# Altium PCB CAN_TO_USART_V2.2.PcbDoc (part 1 of 2)
Units mil, origin at the board's own origin, x right, y up, seen from the top; angles counter-clockwise.
Board outline 2554.34 x 2204.34 mil, 2 copper layers (Top Layer, Bottom Layer); 154 components, 100 nets, 467 pads, 218 vias.
Unrouted connection lines stored in the file: 118.
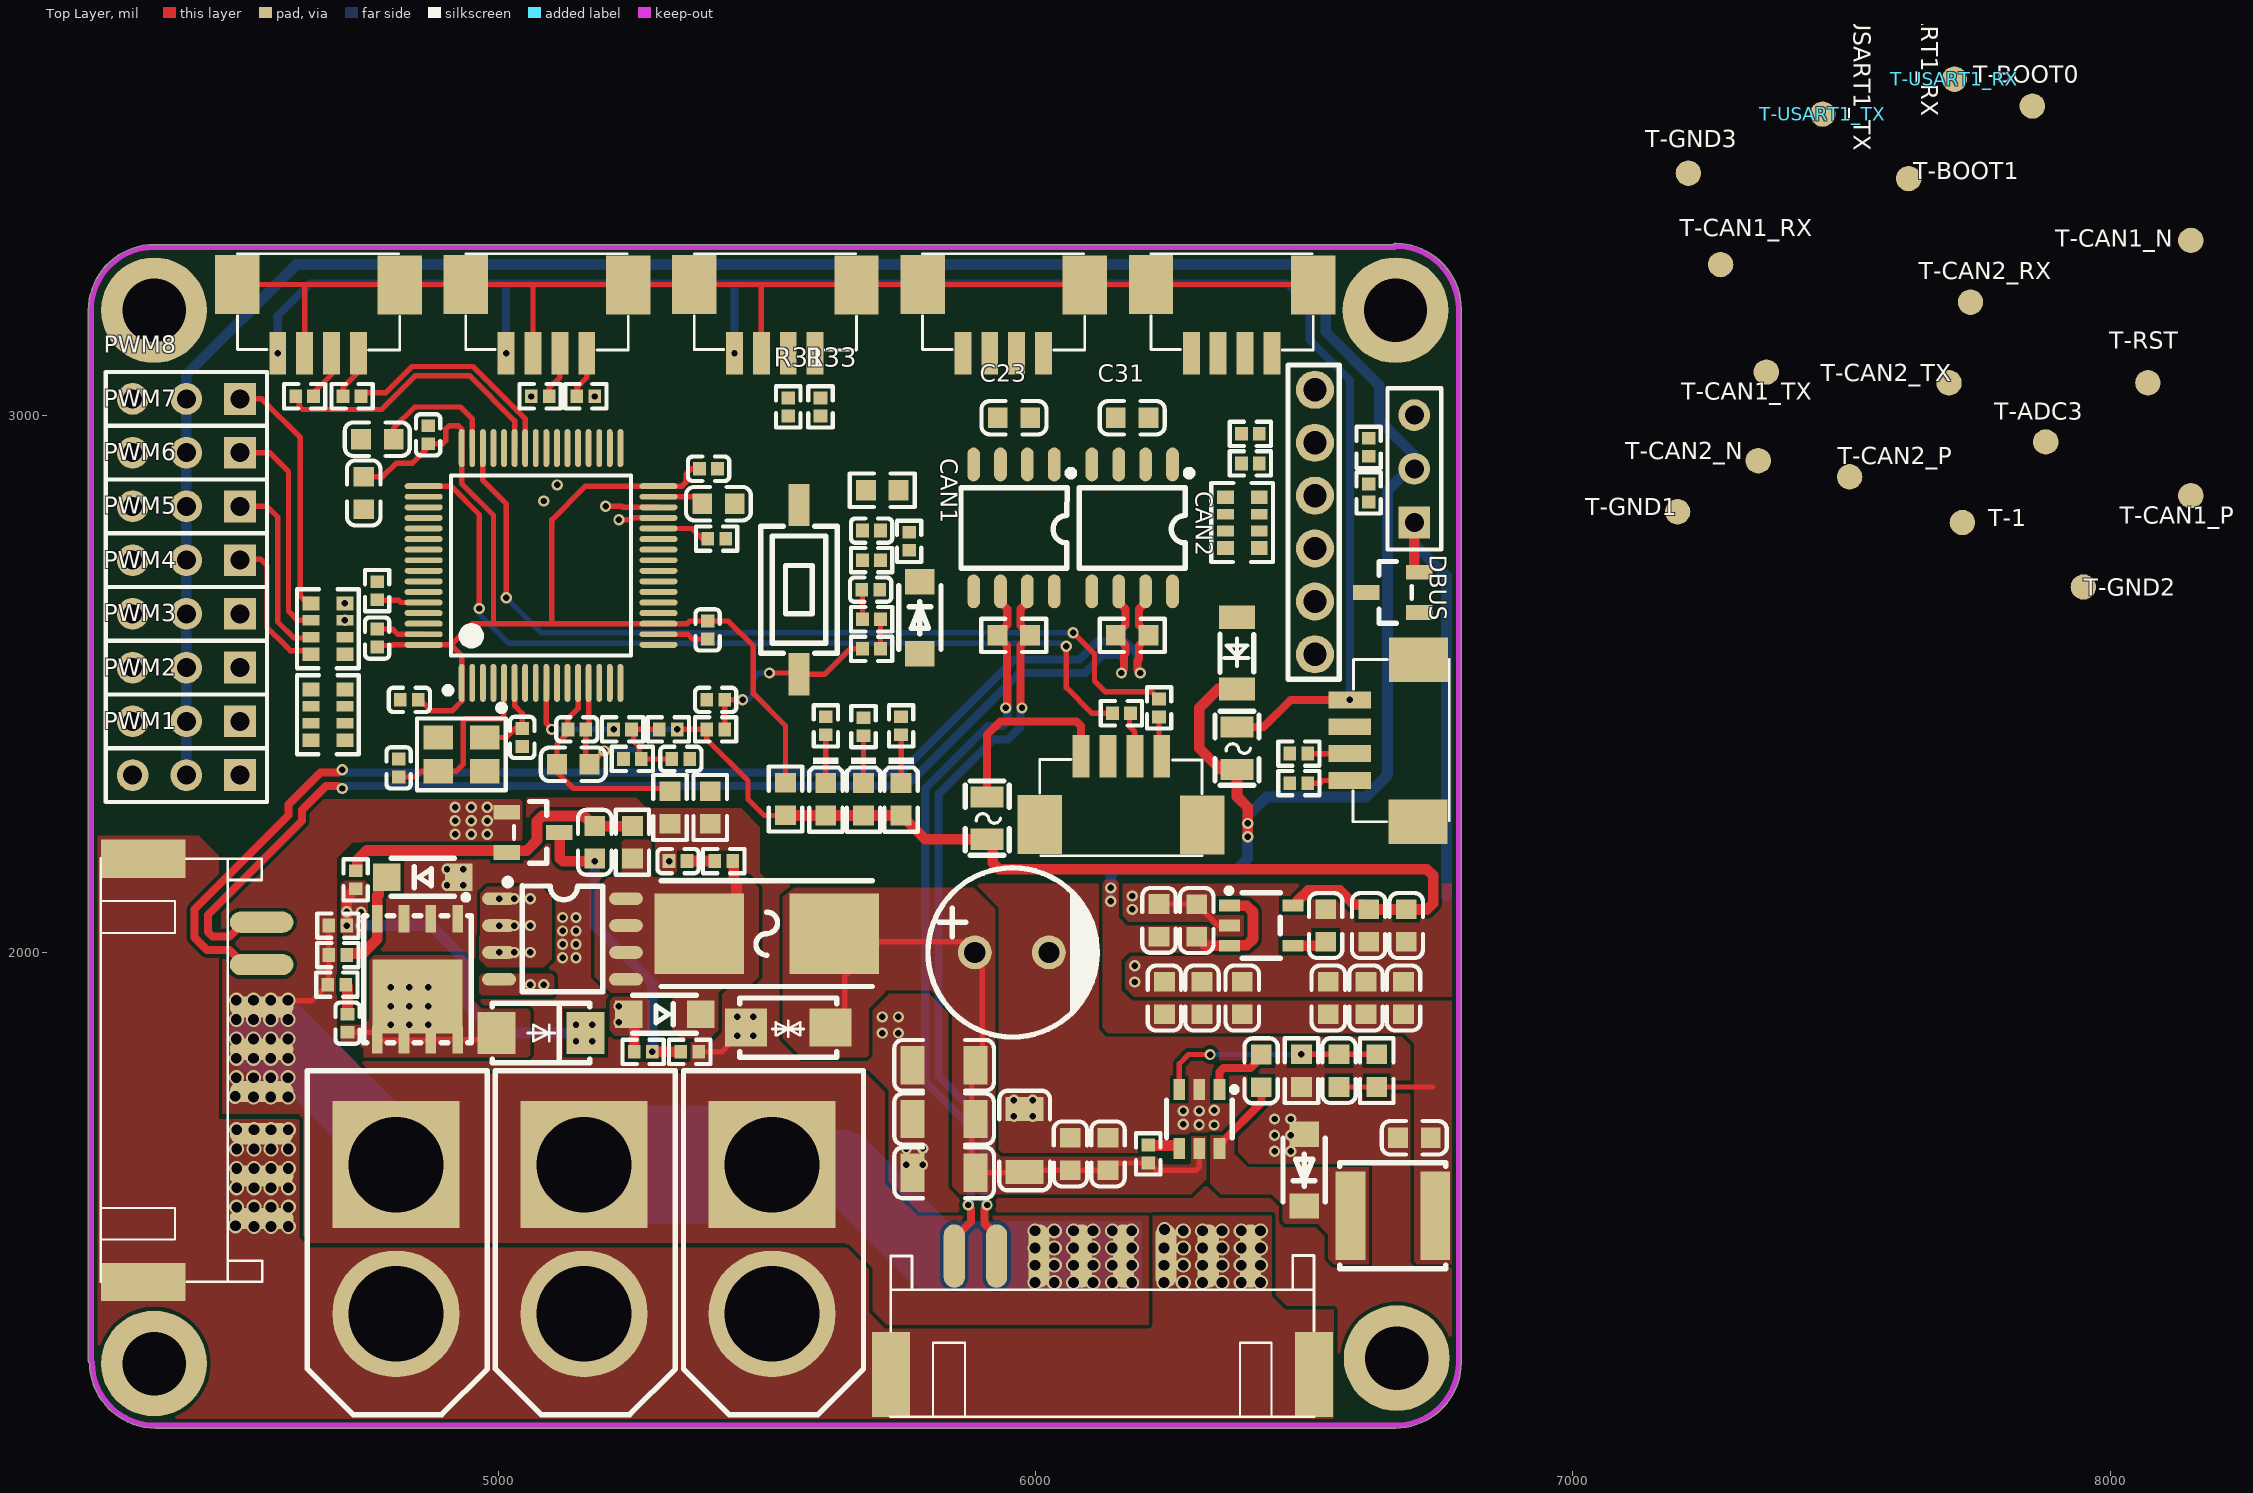
[diagram p0: Top Layer view]
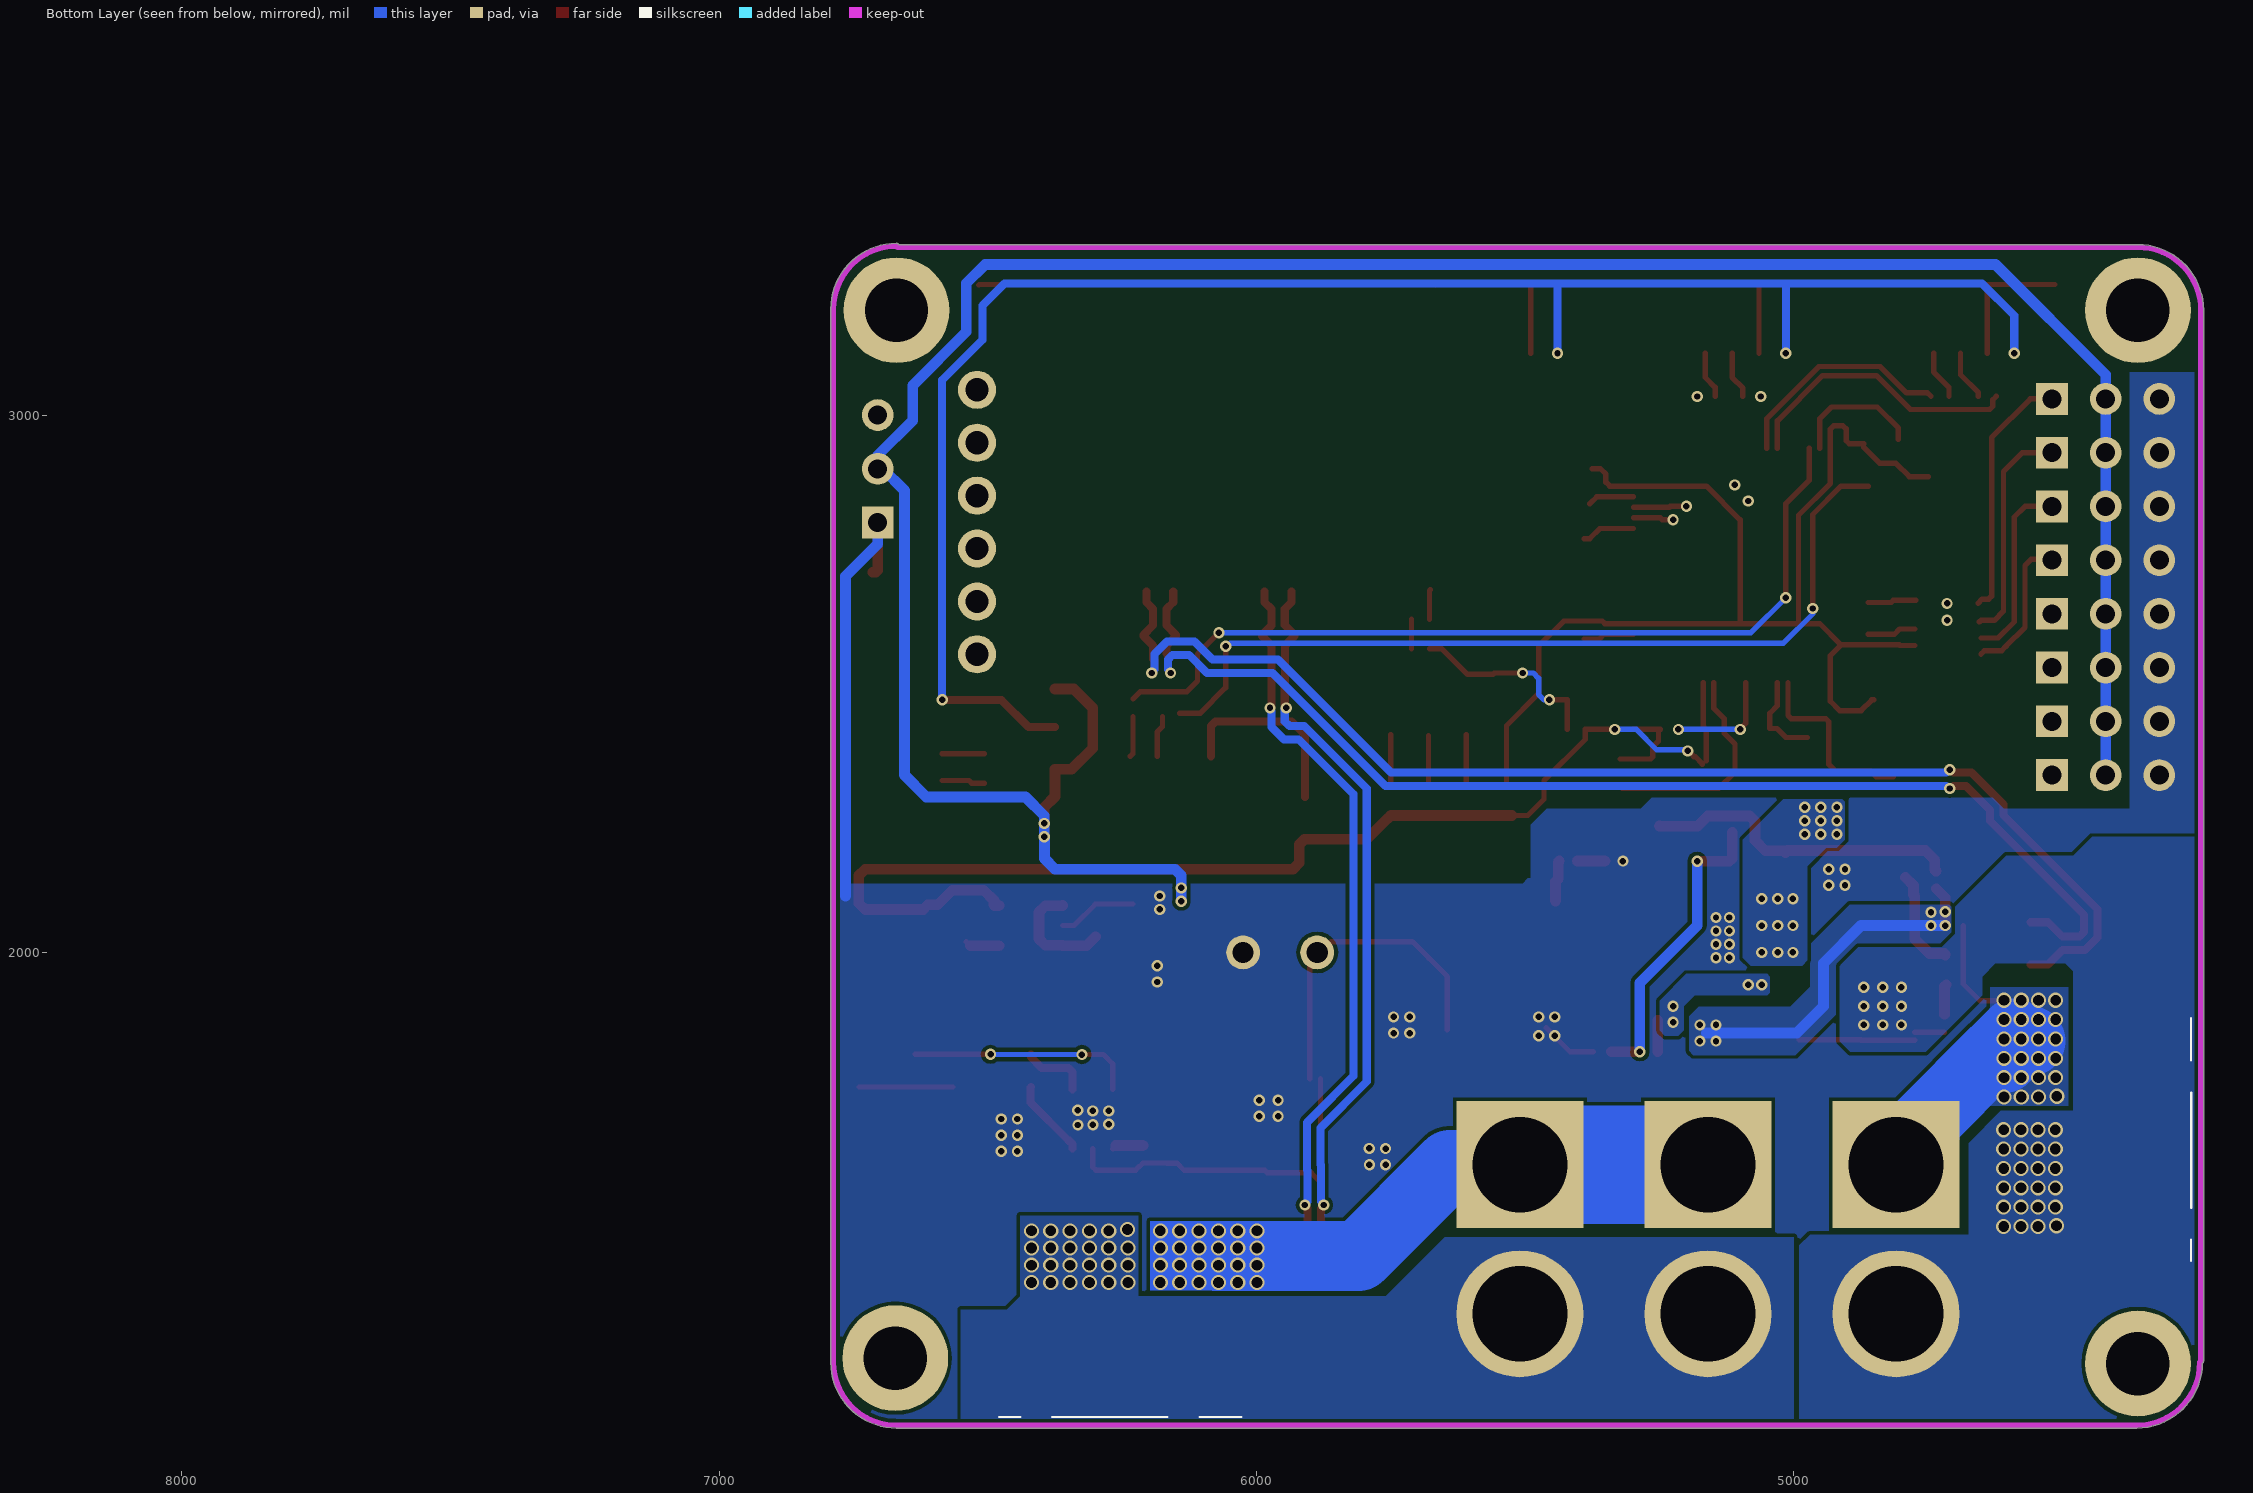
[diagram p1: Bottom Layer view, seen from below]

## Layer stack, top to bottom
Top Solder: solder mask 0.4, Solder Resist, Dk 3.5
Top Layer: signal copper 1.4
Dielectric 1: dielectric 12.6, FR-4, Dk 4.8
Bottom Layer: signal copper 1.4
Bottom Solder: solder mask 0.4, Solder Resist, Dk 3.5

## Board outline
4237.83,1239.31 ccw(c4242.85,1239.31) 4239.32,1235.74 4239.3,1235.76 4240,1235.06 ccw(c4362.15,1237.15) 4362.15,1114.98 6670,1114.98 ccw(c6670,1237.15) 6792.17,1237.15 6792.17,3197.15 ccw(c6670,3197.15) 6670,3319.32 ccw(c6670,3314.31) 6666.44,3317.84 6666.45,3317.85 6665.77,3317.17 4360,3317.17 ccw(c4360,3195) 4237.83,3195

## Design rules (kind name [scope] priority, off if disabled: settings)
Clearance [All] p1: gap=7 ignorepadtopadclearanceinfootprint=TRUE
ComponentClearance [All] p1: gap=0 collisioncheckmode=3 verticalgap=0 showdistances=FALSE
DiffPairsRouting DiffPairsRouting_1 [InDifferentialPair ('CAN1')] p1: maxlimit=10 minlimit=10 mostfreqgap=10 toplayer_minwidth=15 toplayer_maxwidth=15 toplayer_prefwidth=15 bottomlayer_minwidth=15 bottomlayer_maxwidth=15 bottomlayer_prefwidth=15 maxuncoupledlength=500
DiffPairsRouting DiffPair_DiffPairsRouting [InDifferentialPair ('CAN1')] p2: maxlimit=10 minlimit=10 mostfreqgap=10 toplayer_minwidth=15 toplayer_maxwidth=15 toplayer_prefwidth=15 bottomlayer_minwidth=15 bottomlayer_maxwidth=15 bottomlayer_prefwidth=15 maxuncoupledlength=500
DiffPairsRouting [All] p3: maxlimit=10 minlimit=10 mostfreqgap=10 toplayer_minwidth=15 toplayer_maxwidth=15 toplayer_prefwidth=15 bottomlayer_minwidth=15 bottomlayer_maxwidth=15 bottomlayer_prefwidth=15 maxuncoupledlength=500
HoleSize [All] p1: absolutevalues=TRUE maxlimit=500 minlimit=1 maxpercent=80.000 minpercent=20.000
MatchedLengths [InDifferentialPair ('CAN1')] p1: tolerance=1000 checknetsindiffpair=FALSE checkdiffpairvsdiffpair=TRUE checkxsignals=TRUE checkothers=TRUE
MatchedLengths DiffPair_MatchedLengths [InDifferentialPair ('CAN1')] p2: tolerance=1000 checknetsindiffpair=FALSE checkdiffpairvsdiffpair=TRUE checkxsignals=TRUE checkothers=TRUE
MinimumSolderMaskSliver [All] p1: minsoldermaskwidth=0
PlaneConnect [All] p1: planeconnectstyle=Direct reliefexpansion=20 reliefentries=4 reliefconductorwidth=10 reliefairgap=10
PolygonConnect [All] p1: connectstyle=Direct reliefconductorwidth=10 reliefentries=4 polygonreliefangle="90 Angle" airgapwidth=10
RoutingVias [All] p1: holewidth=28 width=25 viastyle="Through Hole" minholewidth=12 minwidth=20 maxholewidth=28 maxwidth=50
SilkToSilkClearance [All] p1: silktosilkclearance=0
SilkToSolderMaskClearance [IsPad] p1: minsilkscreentomaskgap=0 clearancetoexposedcopper=TRUE
SolderMaskExpansion [All] p1: expansion=4 istentingtop=FALSE
Width [All] p1: maxlimit=250 minlimit=10 preferedwidth=10
23 further rules are at their usual default settings.

## Classes and differential pairs
component class CAN_TO_USART_V2.1: C23 C31 CAN1 CAN2 DBUS P1 P2 P3 PWM1 PWM2 PWM3 PWM4 PWM5 PWM6 PWM7 PWM8 R31 R33 T-1 T-ADC3 T-BOOT0 T-BOOT1 T-CAN1_N T-CAN1_P T-CAN1_RX T-CAN1_TX T-CAN2_N T-CAN2_P T-CAN2_RX T-CAN2_TX T-GND1 T-GND2 T-GND3 T-RST T-USART1_RX T-USART1_TX
differential pair CAN2: +CAN2_P -CAN2_N
differential pair CAN1: +CAN1_P -CAN1_N

## Components (designator, comment, footprint, x,y, rotation, side; value= is the part's Value field where it differs from the comment)
3.3A "0154005.DRT" "FUSE 3.3A" 5500,2035 r180 top
C1 "10uF/1206/50V" 1206_C 5980,1650 r270 top
C2 "10uF/1206/50V" 1206_C 5830,1590 r0 top
C3 "100nF/0603/50V" 0603_C 6135,1625 r90 top
C4 "100nF/0603/50V" 0603_C 6065,1625 r90 top
C5 "100uF" "100UF E" 5956.1,2000 r0 top
C6 "10nF/0402/50V" 0402_C 5335,2170 r0 top
C7 "10nF/0402/50V" 0402_C 4720,1868.27 r90 top
C8 "100nF/0603/50V" 0603_C 5180,2205 r90 top
C9 "100nF/0603/50V" 0603_C 6420,1779.68 r90 top
C10 "10uF/0603/10V" 0603_C 6705,1655 r0 top
C11 "10uF/0603/10V" 0603_C 6240,1915 r270 top
C12 "100nF/0603/50V" 0603_C 6310,1915 r270 top
C14 "33pF/0603/50V" 0603_C 6565,1780 r90 top
C15 "10uF/0603/10V" 0603_C 6230,2059.68 r90 top
C16 "10uF/0603/10V" 0603_C 6620,2050 r90 top
C17 "100nF/0603/50V" 0603_C 6690,2050 r90 top
C18 "100nF/0402/16V" 0402_C 5405,2470 r180 top
C19 "100nF/0402/16V" 0402_C 4835,2470 r180 top
C20 "100nF/0402/16V" 0402_C 4775,2585 r270 top
C21 "22pF/0402/50V" 0402_C 4815,2343.27 r270 top
C22 "22pF/0402/50V" 0402_C 5045,2400 r90 top
C23 "100nF/0603/50V" 0603_C 5960,2995 r0 top
C24 "100nF/0402/16V" 0402_C 5146.73,2415 r180 top
C25 "1uF/0603/50V" 0603_C 5140,2350 r0 top
C26 "10uF/0603/10V" 0603_C 4750,2855 r270 top
C27 "100nF/0402/16V" 0402_C 5340,2360 r180 top
C28 "100nF/0402/16V" 0402_C 4870,2963.27 r270 top
C29 "100nF/0402/16V" 0402_C 5390,2600 r270 top
C30 "2.2uF/0603/16V" 0603_C 4775.31,2955 r180 top
C31 "100nF/0603/50V" 0603_C 6180,2995 r0 top
C32 "2.2uF/0603/16V" 0603_C 5410,2835 r180 top
C33 "100nF/0402/16V" 0402_C 5391.73,2900 r180 top
C34 "100nF/0603/50V" 0603_C 6300,2059.37 r270 top
C37 "10uF/0603/10V" 0603_C 6685,1915 r270 top
C38 "10uF/1206/50V" 1206_C 5830,1690 r0 top
C39 "10uF/1206/50V" 1206_C 5830,1790 r0 top
C40 "22nF/0603/50V" 0603_C 6540,2050 r90 top
C41 "10uF/0603/10V" 0603_C 6615,1915 r270 top
C42 "10uF/0603/10V" 0603_C 6545,1915 r270 top
C43 "10uF/0603/10V" 0603_C 6385,1915 r270 top
C50 "10nF/0402/50V" 0402_C 5695,2785 r0 top
C51 "220nF/0402/16V" 0402_C 5693.27,2675 r180 top
CAN1 "SIT65HVD233DR" CAN-MCU 5960,2790 r180 top
CAN2 "SIT65HVD233DR" CAN-MCU 6180,2790 r180 top
D1 "SMAJ26CA" SMAJ26CA 5540,1860 r0 top
D2 "SMAJ26A_C356747" SMA_L4.4-W2.8-LS5.4-RD 5080,1850 r180 top
D3 "MMSZ10VBW_C541670" SOD-123_L2.7-W1.6-LS3.7-RD 5310,1885 r180 top
D4 "MMSZ10VBW_C541670" SOD-123_L2.7-W1.6-LS3.7-RD 4860,2140 r0 top
D5 "B5819W" SOD-123_L2.8-W1.8-LS3.7-RD 6500,1595 r90 top
D6 "黄灯 0603" 0603_LED_S1 5750,2285 r270 top
D7 "ZMM5V6" ZMM5.6V 6375,2556.93 r90 top
D50 "B5819W" SOD-123_L2.8-W1.8-LS3.7-RD 5785,2623.07 r270 top
DBUS "Header 3" HDR1X3 6705,2800 r90 top
F1 "自恢复 1A" "1A 0805" 6375,2380 r90 top
F2 "自恢复 1A" "1A 0805" 5910,2250 r90 top
GPIO1 "6-PIN" 6P 6520,2753.15 r90 top
J1 "XT60_F" XT60_F（立式） 4810,1465 r0 top
J2 "XT60_F" XT60_F（立式） 5160,1465 r0 top
J3 "XT60_F" XT60_F（立式） 5510,1465 r0 top
J4 "GHS1.25 4P" SM04B-GHS立式 6160,2275 r180 top
J5 "CAN1_4PIN" SM04B-GHS卧式 5940,3205 r0 top
J6 "CAN2_4PIN" SM04B-GHS卧式 6365,3205 r0 top
J7 "GHS1.25 4P_1" SM04B-GHS卧式 4665,3205 r0 top
J8 "GHS1.25 4P_1" SM04B-GHS卧式 5090,3205 r0 top
J9 "GHS1.25 4P_1" SM04B-GHS卧式 6675,2395 r270 top
J10 "GHS1.25 4P_1" SM04B-GHS卧式 5515,3205 r0 top
KEY1 "KEY_M" KEY 5560,2675 r270 top
L1 "10uH (立创号C182189)" "10UH 1A" 6665,1510 r0 top
LED1 "黄灯 0603" 0603_LED_S1 5610,2285 r270 top
LED2 "黄灯 0603" 0603_LED_S1 5680,2285 r270 top
P5 "CAN_8PIN卧式" 8Pin 6130,1280 r0 top
P6 "CAN_8PIN卧式" 8Pin 4405,1775.22 r270 top
PWM1 "Header 3" HDR1X3 4520,2330 r180 top
PWM2 "Header 3" HDR1X3 4520,2430 r180 top
PWM3 "Header 3" HDR1X3 4520,2530 r180 top
PWM4 "Header 3" HDR1X3 4520,2630 r180 top
PWM5 "Header 3" HDR1X3 4520,2730 r180 top
PWM6 "Header 3" HDR1X3 4520,2830 r180 top
PWM7 "Header 3" HDR1X3 4520,2930 r180 top
PWM8 "Header 3" HDR1X3 4520,3030 r180 top
"Q1 PMOS" "TPCA8122" "PMOS TCPA8122" 5120,2025 r270 top
Q2 "2N5401S-RTK/P" SOT-23-3_L2.9-W1.6-P1.90-LS2.8-TR-CW#1 5065,2223.28 r180 top
"Q3 NMOS" "PSMN1R4-40YLD" "NMOS PSMN1R5-30" 4850,1950 r180 top
Q4 "2N5551S-RTK/P" SOT-23-3_L2.9-W1.6-P1.90-LS2.8-TR-CW#2 6665,2670 r0 top
R1 "1.2MΩ/0603/1%" 0603_R 5250,2205 r270 top
R2 "100KΩ/0402/1%" 0402_R 4701.73,1995 r180 top
R3 "100KΩ/0402/1%" 0402_R 4701.73,2050 r180 top
R4 "1KΩ/0402/1%" 0402_R 4735,2135 r90 top
R5 "1KΩ/0402/1%" 0402_R 5270,1815 r180 top
R6 "10KΩ/0402/1%" 0402_R 5356.73,1815 r180 top
R7 "23.7K/0603/1%" 0603_R 6495,1780 r90 top
R8 "100KΩ/0402/1%" 0402_R 6210,1625 r270 top
R9 "124KΩ/0603/1%" 0603_R 6635,1780 r90 top
R13 "4.7KΩ/0402/1%" 0402_R 6620,2855 r270 top
R14 "4.7KΩ/0402/1%" 0402_R 6620,2940 r90 top
R15 "100Ω/0402/1%" 0402_R 4640,3035 r0 top
R16 "100Ω/0402/1%" 0402_R 4728.27,3035 r180 top
R18 "1KΩ/0402/1%" 0402_R 5316.73,2415 r180 top
R19 "100Ω/0402/1%" 0402_R 5078.27,3035 r0 top
R20 "120Ω/0603/±1%" 0603_R 5959.68,2590 r0 top
R21 "100Ω/0402/1%" 0402_R 5231.73,2415 r180 top
R22 "100Ω/0402/1%" 0402_R 5163.27,3035 r180 top
R23 "1KΩ/0402/1%" 0402_R 5250,2360 r0 top
R24 "100Ω/0402/1%" 0402_R 6490,2370 r0 top
R25 "100Ω/0402/1%" 0402_R 6490,2315 r0 top
R27 "120Ω/0603/±1%" 0603_R 6180,2590 r0 top
R28 "100Ω/0402/1%" 0402_R 6160,2445 r0 top
R30 "100Ω/0402/1%" 0402_R 6230,2455 r270 top
R31 "100Ω/0402/1%" 0402_R 5540,3015 r90 top
R33 "100Ω/0402/1%" 0402_R 5600,3015 r90 top
R36 "100Ω/0402/1%" 0402_R 6400,2910 r0 top
R38 "100Ω/0402/1%" 0402_R 6400,2965 r0 top
R41 "1KΩ/0402/1%" 0402_R 5750,2421.73 r90 top
R42 "0Ω/0602/1%" 0603_R 5535,2285.31 r90 top
R44 "10KΩ/0402/1%" 0402_R 4775,2673.27 r90 top
R45 "10KΩ/0402/1%" 0402_R 5406.73,2770 r180 top
R46 "0Ω/0602/1%" 0603_R 5320,2269.69 r270 top
R47 "0Ω/0602/1%" 0603_R 5395,2269.69 r270 top
R50 "33Ω/0402/1%" 0402_R 4700,1940 r180 top
R51 "33Ω/0402/1%" 0402_R 5420,2170 r0 top
R53 "1KΩ/0402/1%" 0402_R 5680,2420 r90 top
R54 "1KΩ/0402/1%" 0402_R 5610,2421.73 r90 top
R55 "10KΩ/0402/1%" 0402_R 5405,2415 r180 top
R60 "100KΩ/0402/1%" 0402_R 5765,2765 r90 top
R61 "510KΩ/0402/1%" 0402_R 5695,2730 r0 top
R62 "330KΩ/0402/1%" 0402_R 5695,2620 r0 top
R63 "100KΩ/0402/1%" 0402_R 5695,2565 r180 top
R64 "2MΩ/0603/1%" 0603_R 5715,2860 r0 top
RN1 "100R_P" 100R_P 6385,2800 r90 top
RN2 "100R_P" 100R_P 4683.51,2442.24 r90 top
RN3 "100R_P" 100R_P 4683.51,2602.24 r90 top
T-1 "TEST" TEST-POINT 7725,2800 r90 top
T-ADC3 "TEST" TEST-POINT 7880,2950 r90 top
T-BOOT0 "TEST" TEST-POINT 7855,3575 r270 top
T-BOOT1 "TEST" TEST-POINT 7625,3440 r90 top
T-CAN1_N "TEST" TEST-POINT 8150,3325 r90 top
T-CAN1_P "TEST" TEST-POINT 8150,2850 r90 top
T-CAN1_RX "TEST" TEST-POINT 7275,3280 r90 top
T-CAN1_TX "TEST" TEST-POINT 7360,3080 r90 top
T-CAN2_N "TEST" TEST-POINT 7345,2915 r90 top
T-CAN2_P "TEST" TEST-POINT 7515,2885 r90 top
T-CAN2_RX "TEST" TEST-POINT 7740,3210 r90 top
T-CAN2_TX "TEST" TEST-POINT 7700,3060 r90 top
T-GND1 "TEST" TEST-POINT 7195,2820 r90 top
T-GND2 "TEST" TEST-POINT 7950,2680 r90 top
T-GND3 "TEST" TEST-POINT 7215,3450 r90 top
T-RST "TEST" TEST-POINT 8070,3060 r0 top
T-USART1_RX "TEST" TEST-POINT 7710,3625 r90 top
T-USART1_TX "TEST" TEST-POINT 7465,3560 r90 top
U1 "MP2451" MP2451 6305,1690 r90 top
U2 "SPX3819" SPX3819 6420,2050 r0 top
U3 "STM32F405RGT6" STM32F405RGT6 5080,2720 r0 top
Y1 "25MHZ 12PF 10PPM" SMD-3225_4P 4931.69,2368.5 r180 top

## Footprints (in the part's own frame and the unit in brackets; to place one, negate y for a bottom-side part, rotate by r counter-clockwise, add the part's x,y. Pads: shape width x height; smd on the part's side, far side on the other; paste and mask are expansions set on the pad)
"1A 0805" [mm]
  rect 1x1.55 smd: 1(-1,0) 2(1,0)
  silkscreen extent -1.75,-1.04 1.75,1.04
6P [mm]
  round 1.8 hole 1.1: 1(-5.04,0) 2(-2.54,0) 3(-0.04,0) 4(2.46,0) 5(4.96,0) 6(7.46,0)
  silkscreen extent -6.22,-1.14 8.64,1.27
8Pin [mm]
  oval 1x3 smd: 1(6.864,3.937) 2(4.864,3.937) 3(2.864,3.937) 4(0.864,3.937) 5(-1.136,3.937) 6(-3.136,3.937) 7(-5.136,3.937) 8(-7.136,3.937)
  rect 1.8x4 smd: 9(-10.136,-1.663) 10(9.864,-1.663)
  silkscreen extent -10.15,-3.66 9.86,3.96
"10UH 1A" [mm]
  rect 1.4x4.2 smd: 1(-2,0) 2(2,0)
  silkscreen extent -2.5,-2.5 2.5,2.5
100R_P [mm]
  rect 0.65x0.8 smd: 1(-1.2,-0.8) 4(1.2,-0.8) 5(1.2,0.8) 8(-1.2,0.8)
  rect 0.5x0.8 smd: 2(-0.4,-0.8) 3(0.4,-0.8) 6(0.4,0.8) 7(-0.4,0.8)
  silkscreen extent -1.87,-1.45 1.87,1.47
"100UF E" [mm]
  round 1.6 hole 1: 1(-1.75,0) 2(1.75,0)
  silkscreen extent -3.96,-4 4.04,4
0402_C [mm]
  rect 0.6x0.65 smd mask+0.051: 1(-0.425,0) 2(0.425,0)
  silkscreen extent -0.97,-0.58 0.97,0.58, body extent -0.48,-0.3 0.52,0.3, height 0.2
0402_R [mm]
  rect 0.6x0.65 smd mask+0.051: 1(-0.425,0) 2(0.425,0)
  silkscreen extent -0.97,-0.58 0.97,0.58, body extent -0.57,-0.27 0.58,0.28, height 0.41
0603_C [mm]
  rect 0.93x0.98 smd: 1(-0.77,0) 2(0.77,0)
  silkscreen extent -1.53,-0.79 1.54,0.79, body extent -0.8,-0.4 0.8,0.4, height 0.3
0603_LED_S1 [mm]
  rect 0.93x0.98 smd: A(0.77,0) K(-0.77,0)
  silkscreen extent -1.98,-0.79 1.54,0.79, body extent -0.8,-0.4 0.8,0.4, height 0.6
0603_R [mm]
  rect 0.93x0.98 smd: 1(-0.77,0) 2(0.77,0)
  silkscreen extent -1.53,-0.79 1.54,0.79, body extent -0.85,-0.4 0.85,0.4, height 0.56
1206_C [mm]
  rect 1.13x1.8 smd: 1(-1.49,0) 2(1.49,0)
  silkscreen extent -2.36,-1.2 2.35,1.2, body extent -1.6,-0.81 1.6,0.79, height 1
CAN-MCU [mm]
  oval 0.6x1.598 smd: 1(-1.905,-3) 2(-0.635,-3) 3(0.635,-3) 4(1.905,-3) 5(1.905,3) 6(0.635,3) 7(-0.635,3) 8(-1.905,3)
  silkscreen extent -2.84,-2.74 2.5,1.9
"FUSE 3.3A" [mm]
  rect 4.24x3.81 smd: 1(-3.185,0) 2(3.185,0)
  silkscreen extent -5,-2.5 5,2.5
HDR1X3 [mm] "Connector; Header; 3 Position"
  rect 1.5x1.5 hole 0.9: 1(0,0)
  round 1.5 hole 0.9: 2(2.54,0) 3(5.08,0)
  silkscreen extent -1.27,-1.27 6.35,1.27
KEY [mm]
  rect 2x1 smd: 1(-4,0) 2(4,0)
  silkscreen extent -3,-1.8 3,1.8
MP2451 [mm]
  rect 1x0.55 smd: 1(1.4,-0.95) 2(1.4,0) 3(1.4,0.95) 4(-1.4,0.95) 5(-1.4,0) 6(-1.4,-0.95)
  silkscreen extent -0.9,-1.78 1.52,1.55
"NMOS PSMN1R5-30" [mm]
  rect 0.5x1.3 smd: 1(-1.905,-2.858) 2(-0.635,-2.858) 3(0.635,-2.858) 4(1.905,-2.858) 5(1.905,2.858) 6(0.635,2.858) 7(-0.635,2.858) 8(-1.905,2.858)
  rect 4.25x3.5 smd: 8(0,0.813)
  silkscreen extent -2.54,-4 2.54,3
"PMOS TCPA8122" [mm]
  oval 0.6x1.598 smd: 1(-1.905,-3) 2(-0.635,-3) 3(0.635,-3) 4(1.905,-3) 5(1.905,3) 6(0.635,3) 7(-0.635,3) 8(-1.905,3)
  silkscreen extent -2.84,-2.74 2.5,1.9
SM04B-GHS卧式 [mm]
  rect 0.8x2 smd: 1(1.905,-2.286) 2(0.635,-2.286) 3(-0.635,-2.286) 4(-1.905,-2.286)
  rect 2.1x2.8 smd: 5(3.861,0.94) 6(-3.81,0.965)
  silkscreen extent -3.81,-2.13 3.86,2.41
SM04B-GHS立式 [mm]
  rect 0.8x2 smd: 1(-1.905,-2.286) 2(-0.635,-2.286) 3(0.635,-2.286) 4(1.905,-2.286)
  rect 2.1x2.8 smd: 5(3.861,0.94) 6(-3.81,0.965)
  silkscreen extent -3.81,-2.13 3.86,2.41
SMA_L4.4-W2.8-LS5.4-RD [mm]
  rect 1.8x2 smd: 1(-2.1,0) 2(2.1,0)
  silkscreen extent -2.3,-1.4 2.3,1.4
SMAJ26CA [mm]
  rect 2x1.8 smd: 1(-2,0) 2(2,0)
  silkscreen extent -2.3,-1.4 2.3,1.4
SMD-3225_4P [mm]
  rect 1.4x1.15 smd: 1(-1.1,-0.8) 2(1.1,-0.8) 3(1.1,0.8) 4(-1.1,0.8)
  silkscreen extent -2.1,-2.35 2.1,1.7, body extent -1.6,-1.25 1.6,1.25, height 0.61
SOD-123_L2.7-W1.6-LS3.7-RD [mm]
  rect 1.3x1.3 smd: 1(-1.7,0) 2(1.7,0)
  silkscreen extent -1.5,-0.9 1.5,0.9
SOD-123_L2.8-W1.8-LS3.7-RD [mm]
  rect 1.2x1.4 smd: 1(-1.7,0) 2(1.7,0)
  silkscreen extent -1.5,-1 1.5,1
SOT-23-3_L2.9-W1.6-P1.90-LS2.8-TR-CW#1 [mm]
  rect 1.25x0.7 smd: 1(1.25,-0.95) 2(1.25,0.95) 3(-1.25,0)
  silkscreen extent -0.65,-1.46 0.9,1.46
SOT-23-3_L2.9-W1.6-P1.90-LS2.8-TR-CW#2 [mm]
  rect 1.25x0.7 smd: 1(1.25,0.95) 2(1.25,-0.95) 3(-1.25,0)
  silkscreen extent -0.65,-1.46 0.9,1.46
SPX3819 [mm]
  rect 1x0.55 smd: 1(-1.5,0.95) 2(-1.5,0) 3(-1.5,-0.95) 4(1.5,-0.95) 5(1.5,0.95)
  silkscreen extent -1.65,-1.55 0.9,1.78
STM32F405RGT6 [mil]
  oval 11.02x70.7 smd: 1(-147.64,-218.5) 2(-127.95,-218.5) 3(-108.27,-218.5) 4(-88.58,-218.5) 5(-68.9,-218.5) 6(-49.21,-218.5) 7(-29.53,-218.5) 8(-9.84,-218.5) 9(9.84,-218.5) 10(29.53,-218.5) 11(49.21,-218.5) 12(68.9,-218.5) 13(88.58,-218.5) 14(108.27,-218.5) 15(127.95,-218.5) 16(147.64,-218.5) 33(147.64,218.5) 34(127.95,218.5) 35(108.27,218.5) 36(88.58,218.5) 37(68.9,218.5) 38(49.21,218.5) 39(29.53,218.5) 40(9.84,218.5) 41(-9.84,218.5) 42(-29.53,218.5) 43(-49.21,218.5) 44(-68.9,218.5) 45(-88.58,218.5) 46(-108.27,218.5) 47(-127.95,218.5) 48(-147.64,218.5)
  oval 70.7x11.02 smd: 17(218.5,-147.64) 18(218.5,-127.95) 19(218.5,-108.27) 20(218.5,-88.58) 21(218.5,-68.9) 22(218.5,-49.21) 23(218.5,-29.53) 24(218.5,-9.84) 25(218.5,9.84) 26(218.5,29.53) 27(218.5,49.21) 28(218.5,68.9) 29(218.5,88.58) 30(218.5,108.27) 31(218.5,127.95) 32(218.5,147.64) 49(-218.5,147.64) 50(-218.5,127.95) 51(-218.5,108.27) 52(-218.5,88.58) 53(-218.5,68.9) 54(-218.5,49.21) 55(-218.5,29.53) 56(-218.5,9.84) 57(-218.5,-9.84) 58(-218.5,-29.53) 59(-218.5,-49.21) 60(-218.5,-68.9) 61(-218.5,-88.58) 62(-218.5,-108.27) 63(-218.5,-127.95) 64(-218.5,-147.64)
  silkscreen extent -179,-238 167,167
TEST-POINT [mm]
  round 1.2 smd: 1(0,0)
XT60_F（立式） [mm]
  rect 6x6 hole 4.5: 1(0,3.556)
  round 6 hole 4.5: 2(0,-3.491)
  silkscreen extent -4.19,-8.25 4.32,8, body extent -3.99,-7.93 4.01,7.97, height 15
ZMM5.6V [mm]
  rect 1.1x1.7 smd: 1(-1.7,0) 2(1.7,0)
  silkscreen extent -0.9,-0.8 0.9,0.8

## Part data
3.3A: BOM_Manufacturer=Littelfuse, BOM_Manufacturer Part=0154005.DRT, BOM_Supplier=LCSC, BOM_Supplier Part=C206917, Contributor=LCSC, spicePre=U, spiceSymbolName=0154005.DRT
C1 C2 C38 C39: library part "1206 10uF (106) 10% 50V", "贴片电容", Package=1206, SuppliersPartNumber=C13585, ComponentLink1Description=供应商链接, ComponentLink1URL=http://www.szlcsc.com/product/details_14236.html, Supplier=LC
C3 C4 C8 C9 C12 C17 C23 C31 C34: library part "0603 100nF (104) 10% 50V", "贴片电容", Package=0603, SuppliersPartNumber=C14663, ComponentLink1Description=供应商链接, ComponentLink1URL=http://www.szlcsc.com/product/details_15331.html, Supplier=LC
C5: BOM_Manufacturer=ValuePro, BOM_Manufacturer Part="50V 100uF 8X12", BOM_Supplier=LCSC, BOM_Supplier Part=C2749, nameAlias=Capacitance, spicePre=C, spiceSymbolName="50V 100uF 8X12"
C6 C7 C50: library part "0402 10nF (103) 10% 50V", "贴片电容", Package=0402, SuppliersPartNumber=C15195, ComponentLink1Description=供应商链接, ComponentLink1URL=http://www.szlcsc.com/product/details_15869.html, Supplier=LC
C10 C11 C15 C16 C26 C37 C41 C42 C43: library part "0603 10uF (106) 10% 10V", "贴片电容", Package=0603, SuppliersPartNumber=C19702, ComponentLink1Description=供应商链接, ComponentLink1URL=http://www.szlcsc.com/product/details_20411.html, Supplier=LC
C14: library part "0603 33pF (330) 5% 50V", "贴片电容", Package=0603, SuppliersPartNumber=C1663, ComponentLink1Description=供应商链接, ComponentLink1URL=http://www.szlcsc.com/product/details_2015.html, Supplier=LC
C18 C19 C20 C24 C27 C28 C29 C33: library part "0402 100nF (104) 10% 16V", "贴片电容", Package=0402, SuppliersPartNumber=C1525, ComponentLink1Description=供应商链接, ComponentLink1URL=http://www.szlcsc.com/product/details_1877.html, Supplier=LC
C21 C22: library part "0402 22pF (220) 5% 50V", "贴片电容", Package=0402, SuppliersPartNumber=C1555, ComponentLink1Description=供应商链接, ComponentLink1URL=http://www.szlcsc.com/product/details_1907.html, Supplier=LC
C25: library part "0603 1uF (105) 10% 50V", "贴片电容", Package=0603, SuppliersPartNumber=C15849, ComponentLink1Description=供应商链接, ComponentLink1URL=http://www.szlcsc.com/product/details_16531.html, Supplier=LC
C30 C32: library part "0603 2.2uF (225) 10% 16V", "贴片电容", Package=0603, SuppliersPartNumber=C23630, ComponentLink1Description=供应商链接, ComponentLink1URL=http://www.szlcsc.com/product/details_24366.html, Supplier=LC
C40: library part "0603 22nF (223) 10% 50V", "贴片电容", Package=0603, SuppliersPartNumber=C21122, ComponentLink1Description=供应商链接, ComponentLink1URL=http://www.szlcsc.com/product/details_21834.html, Supplier=LC
C51: library part "0402 220nF (224) 10% 16V", "贴片电容", Package=0402, SuppliersPartNumber=C16772, ComponentLink1Description=供应商链接, ComponentLink1URL=http://www.szlcsc.com/product/details_17456.html, Supplier=LC
CAN1 CAN2: BOM_Manufacturer=SIT, BOM_Manufacturer Part=SIT65HVD233DR, BOM_Supplier=LCSC, BOM_Supplier Part=C496620, Contributor=LCSC, spicePre=U, spiceSymbolName=SIT65HVD233DR
D1: library part SMAJ26CA_C353459, BOM_Manufacturer="Shandong Jingdao Microelectronics", BOM_Manufacturer Part=SMAJ26CA, BOM_Supplier=LCSC, BOM_Supplier Part=C353459, Contributor=LCSC, spicePre=D, spiceSymbolName=SMAJ26CA_C353459
D2: BOM_Manufacturer="Jiangsu JieJie Microelectronics", BOM_Manufacturer Part=SMAJ26A, BOM_Supplier=LCSC, BOM_Supplier Part=C356747, Contributor=LCSC, spicePre=D, spiceSymbolName=SMAJ26A_C356747
D3 D4: BOM_Manufacturer=AnBon, BOM_Manufacturer Part=MMSZ10VBW, BOM_Supplier=LCSC, BOM_Supplier Part=C541670, Contributor=LCSC, spicePre=D, spiceSymbolName=MMSZ10VBW_C541670
D5 D50: BOM_LCSC Assembly=Yes, BOM_Manufacturer=MDD, BOM_Manufacturer Part=B5819W, BOM_Supplier=LCSC, BOM_Supplier Part=C64885, image=//image.lceda.cn/szlcsc/C64885.jpg, SMT Type=Extend, spicePre=D, spiceSymbolName=B5819W
D6 LED1 LED2: library part "0603 黄灯", "发光二极管", Package=0603, SuppliersPartNumber=C72038, ComponentLink1Description=供应商链接, ComponentLink1URL=http://www.szlcsc.com/product/details_73147.html, Supplier=LC
D7: BOM_JLCPCB SMD=Yes, BOM_Manufacturer=SEMTECH, BOM_Manufacturer Part=ZMM5V6, BOM_Supplier=LCSC, BOM_Supplier Part=C8062, image=//image.lceda.cn/szlcsc/C8062.jpg, SMT Type=Basic, spicePre=D, spiceSymbolName=ZMM5V6
DBUS PWM1 PWM2 PWM3 PWM4 PWM5 PWM6 PWM7 PWM8: "Header, 3-Pin", LatestRevisionDate=17-Jul-2002, LatestRevisionNote="Re-released for DXP Platform.", Publisher="Altium Limited"
F1 F2: library part ASMD1206-100, BOM_Manufacturer=JDTFUSE, BOM_Manufacturer Part=ASMD1206-100, BOM_Supplier=LCSC, BOM_Supplier Part=C135340, Contributor=LCSC, spicePre=F, spiceSymbolName=ASMD1206-100
J4: "立式"
J5 J6: library part "GHS1.25 4P_1", "卧式短边"
J7 J8 J9 J10: "卧式短边"
L1: library part 10uH, BOM_Manufacturer="Sunltech Tech", BOM_Manufacturer Part=SLW5040S100MST, BOM_Supplier=LCSC, BOM_Supplier Part=C182189, Contributor=LCSC, nameAlias=Inductance, spicePre=L, spiceSymbolName=SLW5040S100MST
P5 P6: library part CAN_8PIN, "卧式"
"Q1 PMOS": library part "PMOS 8PIN", ComponentLink1Description="Manufacturer Link", ComponentLink1URL=http://www.irf.com/, DatasheetVersion=PD-9.390D, LatestRevisionDate=17-Jul-2002, LatestRevisionNote="Re-released for DXP Platform.", Note="Pin 4 not drawn and electrically connected to Pin 2.", PackageDescription="TO, Thru-Hole, Vertical, Heatsink Mounted; 3 In-Line Leads; Pitch 2.54 mm", PackageReference=TO-220AB, PackageVersion=Feb-1997, Published=8-Jun-2000, Publisher="Altium Limited"
Q2: BOM_JLCPCB SMD=Yes, BOM_Manufacturer=KEC, BOM_Manufacturer Part=2N5401S-RTK/P, BOM_Supplier=LCSC, BOM_Supplier Part=C147293, Contributor=LCSC, SMT Type=Extend, spicePre=Q, spiceSymbolName=2N5401S-RTK/P
"Q3 NMOS": library part "NMOS 8PIN", ComponentLink1Description="Manufacturer Link", ComponentLink1URL=http://www.irf.com/, DatasheetVersion=PD-9.814, LatestRevisionDate=17-Jul-2002, LatestRevisionNote="Re-released for DXP Platform.", Note="Pin 2 is electrically connected to pin 4.", PackageDescription="TO, Thru-Hole, Vertical, Heatsink Mounted; 3 In-Line Leads; Pitch 2.54 mm", PackageReference=TO-220AB, PackageVersion=Feb-1997, Published=8-Jun-2000, Publisher="Altium Limited"
Q4: BOM_LCSC Assembly=Yes, BOM_Manufacturer=KEC, BOM_Manufacturer Part=2N5551S-RTK/P, BOM_Supplier=LCSC, BOM_Supplier Part=C112669, Contributor=LCSC, SMT Type=Extend, spicePre=Q, spiceSymbolName=2N5551S-RTK/P
R1: library part "0603 1.2MΩ (1204) 1%", "贴片电阻", Package=0603, SuppliersPartNumber=C22766, ComponentLink1Description=供应商链接, ComponentLink1URL=http://www.szlcsc.com/product/details_23493.html, Supplier=LC
R2 R3 R8 R60 R63: library part "0402 100KΩ (1003) 1%", "贴片电阻", Package=0402, SuppliersPartNumber=C25741, ComponentLink1Description=供应商链接, ComponentLink1URL=http://www.szlcsc.com/product/details_26484.html, Supplier=LC
R4 R5 R18 R23 R41 R53 R54: library part "0402 1KΩ (1001) 1%", "贴片电阻", Package=0402, SuppliersPartNumber=C11702, ComponentLink1Description=供应商链接, ComponentLink1URL=http://www.szlcsc.com/product/details_12256.html, Supplier=LC
R6 R44 R45 R55: library part "0402 10KΩ (1002) 1%", "贴片电阻", Package=0402, SuppliersPartNumber=C25744, ComponentLink1Description=供应商链接, ComponentLink1URL=http://www.szlcsc.com/product/details_26487.html, Supplier=LC
R7 R9: library part "0603 3KΩ (3001) 1%", "贴片电阻", Package=0603, SuppliersPartNumber=C4211, ComponentLink1Description=供应商链接, ComponentLink1URL=http://www.szlcsc.com/product/details_4618.html, Supplier=LC
R13 R14: library part "0402 4.7KΩ (4701) 1%", "贴片电阻", Package=0402, SuppliersPartNumber=C25900, ComponentLink1Description=供应商链接, ComponentLink1URL=http://www.szlcsc.com/product/details_26643.html, Supplier=LC
R15 R16 R19 R21 R22 R24 R25 R28 R30 R31 R33 R36 R38: library part "0402 100Ω (1000) 1%", "贴片电阻", Package=0402, SuppliersPartNumber=C25076, ComponentLink1Description=供应商链接, ComponentLink1URL=http://www.szlcsc.com/product/details_25819.html, Supplier=LC
R20 R27: library part "0603 120Ω (1200) 1%", "贴片电阻", Package=0603, SuppliersPartNumber=C22787, ComponentLink1Description=供应商链接, ComponentLink1URL=http://www.szlcsc.com/product/details_23514.html, Supplier=LC
R42 R46 R47: library part "0603 0Ω (0R0) 1%", "贴片电阻", Package=0603, SuppliersPartNumber=C21189, ComponentLink1Description=供应商链接, ComponentLink1URL=http://www.szlcsc.com/product/details_21903.html, Supplier=LC
R50 R51: library part "0402 33Ω (33R0) 1%", "贴片电阻", Package=0402, SuppliersPartNumber=C25105, ComponentLink1Description=供应商链接, ComponentLink1URL=http://www.szlcsc.com/product/details_25848.html, Supplier=LC
R61: library part "0402 510KΩ (5103) 1%", "贴片电阻", Package=0402, SuppliersPartNumber=C11616, ComponentLink1Description=供应商链接, ComponentLink1URL=http://www.szlcsc.com/product/details_12170.html, Supplier=LC
R62: library part "0402 330KΩ (3303) 1%", "贴片电阻", Package=0402, SuppliersPartNumber=C25778, ComponentLink1Description=供应商链接, ComponentLink1URL=http://www.szlcsc.com/product/details_26521.html, Supplier=LC
R64: library part "0603 2MΩ (2004) 1%", "贴片电阻", Package=0603, SuppliersPartNumber=C22976, ComponentLink1Description=供应商链接, ComponentLink1URL=http://www.szlcsc.com/product/details_23703.html, Supplier=LC
RN1 RN2 RN3: BOM_JLCPCB SMD=Yes, BOM_Manufacturer=UniOhm, BOM_Manufacturer Part=4D03WGJ0101T5E, BOM_Supplier=LCSC, BOM_Supplier Part=C25506, nameAlias="Resistance (Ohms)", SMT Type=Extend, spicePre=R, spiceSymbolName=4D03WGJ0101T5E
Y1: library part "SMD-3225_4P  25MHZ 12PF 10PPM", "贴片晶振", Package=SMD-3225_4P, SuppliersPartNumber=C9006, ComponentLink1Description=供应商链接, ComponentLink1URL=http://www.szlcsc.com/product/details_9526.html, Supplier=LC

## Free pads (board coordinates)
  round 196.85 hole 118.11: 14(4360,1235) 14(4360,3195) 14(6670,3195) 14(6672.15,1245)

## Via types
v1: diameter 21, hole 12, Top Layer to Bottom Layer, tented both sides, 122 vias
v2: diameter 28, hole 20, Top Layer to Bottom Layer, 96 vias

## Nets (pads, with @x,y where several pads share a name; then routed paths per layer and width w, separated by ;. In a path a pad name is that pad's centre, name@x,y a point inside that pad or via, vN(x,y) a via of type N, cw(c..) or ccw(c..) an arc to the next point about the centre after c; other vN are vias at no path point)
3.3V: C16.2 C17.2 C23.1 C24.1 C25.2 C31.1 CAN1.3 CAN2.3 D6.A F2.1 J5.4 J6.4 LED1.A LED2.A R13.1 R18.1 R42.1 R55.2 R62.2 R63.1 U2.5 U3.13 | length 2311.1
  Top Layer w10: C25.2@5163.46,2356.85 C24.1 5168.58,2420.12 U3.13 ; C25.2 5170.31,2350.98 5183.62,2364.29 5186.14,2364.29 5196.85,2375 v1(5197.5,2375) ; v1(5333.46,2415) R55.2 5388.27,2396.73 5465,2320 5465,2285 5495.32,2254.68 R42.1@5525,2254.68 ; R63.1 R62.2
  Top Layer w20: R42.1@5525,2254.68 5595,2254.68 5665,2254.68 5665.32,2255 5749.69,2255 D6.A@5755,2249.69 ; D6.A@5755.98,2249.69 5795.04,2210.63 5911,2210.63 5920.68,2200.95 5920.68,2166.72 5932.4,2155 6728.32,2155 6740.03,2143.28 6740.03,2091.72 6728.32,2080 6690.31,2080 C17.2 6689.69,2080 6620.31,2080 6611.69,2088.62 6593.33,2088.62 6566.33,2115.62 6507.77,2115.62 6488.74,2096.6 6488.74,2088.23 6487.92,2087.4 U2.5
  Bottom Layer w10: v1(5197.5,2375) 5199.6,2377.1 5255.42,2377.1 5293.32,2415 v1(5333.46,2415)
3.3V_SWD: F2.2 J4.4 | length 360.8
  Top Layer w15: F2.2 5910,2405 5935,2430 6076.21,2430 6085,2421.21 J4.4
5V: C10.2 C11.2 C12.2 C14.1 C15.1 C34.2 C37.2 C41.2 C42.2 C43.2 D7.1 DBUS.2 F1.1 L1.2 PWM1.2 PWM2.2 PWM3.2 PWM4.2 PWM5.2 PWM6.2 PWM7.2 PWM8.2 R9.1 U2.1 U2.3 | length 5452.3
  Top Layer w10: C14.1 6739.69,1749.68
  Top Layer w20: C34.2@6299.69,2029.37 6316.46,2012.6 U2.3 6361.55,2013.2 6393.28,2013.2 6405,2024.92 6405,2075.09 6393.28,2086.8 6361.55,2086.8 U2.1 ; D7.1 6340,2490 6305,2455 6305,2380 6344.37,2340.63 F1.1 6375,2290 6395,2270 v1(6395,2215)
  Bottom Layer w20: PWM1.2@4420,2310 4420,3075 4625,3280 6505,3280 6540,3245 6540,3155 6640,3055 6640,2990 6705,2925 DBUS.2 6695.55,2900 6655,2859.45 6655,2330 6614.45,2289.45 6430,2289.45 6395,2254.45 v1(6395,2240) v1(6395,2215) 6394.81,2214.81 6394.81,2174.81 6375,2155 6151.72,2155 6140,2143.28 v1(6140,2095)
  other v1: 6140,2120
5V_USART: F1.2 J7.4 J8.4 J9.4 J10.4 | length 3287.8
  Top Layer w15: F1.2 6424.37,2419.37 6475,2470 v1(6585,2470)
  Bottom Layer w15: v1(4590,3115) 4590,3185 4650,3245 6468.87,3245 6510,3203.87 6510,3140 6585,3065 v1(6585,2470) ; v1(5015,3115) 5015,3245 ; v1(5440,3115) 5440,3245
24V: "Q1 PMOS.1" "Q1 PMOS.2" "Q1 PMOS.3" J1.1 J2.1 J3.1 P5.4 P5.5 P5.6 P6.4 P6.5 P6.6 Q2.1 R2.2 R3.2 R50.2 | length 1585.2
  Top Layer w10: 4625,1910 4653.27,1910 4685,1941.73 R3.2
  Bottom Layer w130: 4560,1835 4580,1835 v2@4610.5,1804.5 ; 4590.5,1849.5 4591,1849 4623,1817 ; v2(4609,1803) v2@4610.5,1804.5 ; J1.1 4756.89,1658.11 4756.89,1683.11 4625,1815 4623,1817 ; J3.1 5640,1605 5810,1435 6035,1435 6075,1435 ; v2@4610.5,1804.5 4623,1817
  Bottom Layer w220: J2.1 J3.1
  other v1: 5001.89,2000 5030,2000 5060,2000 5001.89,2050 5030,2050 5060,2050 5001.89,2100 5030,2100 5060,2100 4920,2220 4950,2220 4980,2220 4920,2245 4950,2245 4980,2245 4920,2270 4950,2270 4980,2270
  other v2: 5999,1386 6035,1386 6071,1386 6107,1386 6143,1386 6179,1386 5999,1418 6035,1418 6071,1418 6107,1418 6143,1418 6179,1418 5999,1450 6035,1450 6071,1450 6107,1450 6143,1450 6179,1450 5999,1482 6035,1482 6071,1482 6107,1482 6143,1482 6179,1482 4545,1731 4577,1731 4609,1731 4510.76,1732.37 4513,1767 4545,1767 4577,1767 4609,1767 4513,1803 4545,1803 4577,1803 4513,1839 4545,1839 4577,1839 4609,1839 4513,1875 4545,1875 4577,1875 4609,1875 4513,1911 4545,1911 4577,1911 4609,1911
24V_OUT: 3.3A.1 C1.2 C2.2 C3.1 C4.1 C5.1 C38.2 C39.2 D1.2 R8.2 U1.5 | length 1284.9
  Top Layer w10: D1.2@5645,1855.69 5645,1955 5679.43,1989.43 5710,2020 5861.1,2020 5901.1,1980 C39.2@5901.1,1765 ; C39.2@5881.1,1765 5881.1,1690 5881.1,1572.56 5898.54,1590 5980.32,1590 5985,1594.68 C4.1 C3.1 6148.31,1607.99 6166.46,1607.99 6166.73,1608.27 R8.2 ; R8.2@6211.73,1607.52 6217.8,1601.46 6218.54,1601.46 6225,1595 6299.14,1595 6305,1600.86 U1.5
ADC3_IN11(PC1): R21.2 T-ADC3.1 U3.9 | length 205.7
  Top Layer w10: U3.9 5089.84,2426.36 5100,2416.2 v1(5100,2415)
  Bottom Layer w10: v1(5100,2415) v1(5215,2415)
AGND: C24.2 C25.1 R46.1 U3.12 | length 405.3
  Top Layer w10: U3.12 5148.9,2453.9 5130,2435 C24.2 5130,2408.18 5109.69,2387.87 C25.1 5109.69,2335.32 5140,2305 R46.1@5320,2305
CAN1_N: CAN1.6 P5.8 R20.1 T-CAN1_N.1 | length 1391.6
  Top Layer w15: P5.8 5849.04,1467.86 5880,1498.82 5880,1523.38 5875,1528.38 v1(5875,1530) ; CAN1.6 5935,2651.65 5947.5,2639.15 5947.5,2609.11 5929.37,2590.98 R20.1 5929.37,2589.02 5947.19,2571.2 5947.19,2510.16 5947.5,2509.84 5947.5,2461.74 5945,2459.24 v1(5945,2455)
  Bottom Layer w15: v1(5875,1530) 5875,1531.62 5880,1536.62 5880,1604.19 5881.16,1605.36 5881.16,1673.48 5795,1759.64 5795,2305 5911.21,2421.21 5938.71,2421.21 5947.5,2430 5947.5,2452.5 v1(5945,2455)
CAN1_P: CAN1.7 P5.7 R20.2 T-CAN1_P.1 | length 1387.9
  Top Layer w15: v1(5910,1530) 5910,1528.38 5905,1523.38 5905,1495.34 5927.78,1472.56 P5.7 ; v1(5975,2455) 5972.5,2457.5 5972.5,2520.2 5972.19,2520.51 5972.19,2571.2 5990,2589.02 R20.2 5990,2590.98 5972.5,2608.48 5972.5,2639.15 5985,2651.65 CAN1.7
  Bottom Layer w15: v1(5910,1530) 5910,1531.62 5905,1536.62 5905,1593.84 5906.16,1595 5906.16,1683.84 5895,1695 5820,1770 5820,2294.64 5921.57,2396.21 5949.07,2396.21 5972.5,2419.64 5972.5,2448.26 5975,2450.76 v1(5975,2455)
CAN1_RX(PA11): CAN1.4 J5.2 T-CAN1_RX.1 U3.44
CAN1_TX(PA12): CAN1.1 J5.1 T-CAN1_TX.1 U3.45
CAN2_N: CAN2.6 P6.8 R27.1 T-CAN2_N.1 | length 2273.6
  Top Layer w15: P6.8 4527.14,2056.18 4500.27,2029.31 4487.84,2029.31 4468.79,2029.31 4460,2038.1 4460,2070 4635,2245 4635,2265 4680,2310 4703.38,2310 4708.38,2305 v1(4710,2305) ; CAN2.6 6155,2651.65 6167.5,2639.15 6167.5,2608.8 6149.69,2590.98 R27.1 6149.69,2589.02 6167.5,2571.2 6167.5,2556.21 6165,2553.71 6165,2526.62 6160,2521.62 v1(6160,2520)
  Bottom Layer w15: v1(4710,2305) 4711.62,2305 4716.62,2310 5760.36,2310 5970.36,2520 6092.12,2520 6125.9,2553.79 6156.21,2553.79 6165,2545 6165,2526.62 6160,2521.62 v1(6160,2520)
CAN2_P: CAN2.7 P6.7 R27.2 T-CAN2_P.1 | length 2397.8
  Top Layer w15: P6.7 4527.14,1977.44 4500.27,2004.31 4477.49,2004.31 4458.43,2004.31 4435,2027.74 4435,2080.36 4610,2255.36 4610,2275.36 4669.64,2335 4703.38,2335 4708.38,2340 v1(4710,2340) ; v1(6195,2520) 6195,2521.62 6190,2526.62 6190,2543.35 6192.5,2545.85 6192.5,2571.2 6210.32,2589.02 R27.2 6210.32,2590.98 6192.5,2608.8 6192.5,2639.15 6205,2651.65 CAN2.7
  Bottom Layer w15: v1(4710,2340) 4711.62,2340 4716.62,2335 5750,2335 5960,2545 6081.76,2545 6115.55,2578.79 6166.57,2578.79 6190,2555.36 6190,2526.62 6195,2521.62 v1(6195,2520)
CAN2_RX(PB12): CAN2.4 J6.2 T-CAN2_RX.1 U3.33
CAN2_TX(PB13): CAN2.1 J6.1 T-CAN2_TX.1 U3.34
DBUS: D50.2 DBUS.3 R14.2
GND: C18.2 C19.2 C20.1 C21.1 C22.1 C23.2 C26.2 C27.1 C28.1 C29.2 C30.2 C31.2 C32.1 C33.1 C50.1 C51.1 CAN1.2 CAN1.8 CAN2.2 CAN2.8 D7.2 J4.3 J4.5 J4.6 J5.3 J5.5 J5.6 J6.3 J6.5 J6.6 J7.3 J7.5 J7.6 J8.3 J8.5 J8.6 J9.3 J9.5 J9.6 J10.3 J10.5 J10.6 KEY1.1 R23.1 R41.2 R44.2 R45.1 R47.1 R61.1 R64.1 T-GND1.1 T-GND2.1 T-GND3.1 U3.18 U3.63 | length 2572.5
  Top Layer w10: J7.6 4640,3243 ; J7.3 4640,3243 ; C20.1 4803.27,2601.73 4812.95,2592.05 U3.63 ; J8.3 5065,3243 ; U3.18 5352.95,2592.05 5361.73,2583.27 C29.2 ; J10.3 5490,3243 ; J10.5 5666,3243 5490,3243 ; J10.5@5667,3243 J5.6 6092,3243 J6.6 6516,3243 J6.5 ; 4640,3243 4817,3243 J8.6 5065,3243 ; 5065,3243 5242,3243 J10.6 5490,3243
GPIO1_SPI1_NSS(PA4): RN1.1 U3.20
GPIO2_SPI1_SCK(PA5): RN1.2 U3.21
GPIO3_SPI1_MISO(PA6): RN1.3 U3.22
GPIO4_SPI1_MOSI(PA7): RN1.4 U3.23
GPIO5(PC4): R36.1 U3.24
GPIO6(PC5): R38.1 U3.25
IGND: "Q3 NMOS.5" "Q3 NMOS.6" "Q3 NMOS.7" "Q3 NMOS.8" C7.1 D2.2 J1.2 J2.2 J3.2 P5.1 P5.2 P5.3 P5.9 P5.10 P6.1 P6.2 P6.3 P6.9 P6.10 | length 270
  Top Layer w10: C7.1 4775,1851.54 ; 4775,1836.54 4825,1836.54 4875,1836.54 ; 4875,1837.49 4925,1837.49 D2.2@4990,1837.49
  other v1: 4800,1865 4835,1865 4870,1865 4800,1900 4835,1900 4870,1900 4800,1935 4835,1935 4870,1935
  other v2: 6239,1386 6275,1386 6311,1386 6347,1386 6383,1386 6419,1386 6239,1418 6275,1418 6311,1418 6347,1418 6383,1418 6419,1418 6239,1450 6275,1450 6311,1450 6347,1450 6383,1450 6419,1450 6275,1482 6311,1482 6347,1482 6383,1482 6419,1482 6240.37,1484.24 4545.66,1490.03 4577.66,1490.03 4609.66,1490.03 4511.42,1491.4 4513.66,1526.03 4545.66,1526.03 4577.66,1526.03 4609.66,1526.03 4513.66,1562.03 4545.66,1562.03 4577.66,1562.03 4609.66,1562.03 4513.66,1598.03 4545.66,1598.03 4577.66,1598.03 4609.66,1598.03 4513.66,1634.03 4545.66,1634.03 4577.66,1634.03 4609.66,1634.03 4513.66,1670.03 4545.66,1670.03 4577.66,1670.03 4609.66,1670.03
LED1(PC13): R54.2 U3.2
LED2(PC14): R53.2 U3.3
Net3.3A_2: 3.3A.2 "Q1 PMOS.5" "Q1 PMOS.6" "Q1 PMOS.7" "Q1 PMOS.8" D3.1 R1.2 R51.2 | length 77.3
  Top Layer w20: R51.2 5438.54,2168.19 5438.54,2136.46 5443.57,2131.43 3.3A.2@5443.57,2095.5
NetC6_2: C6.2 R51.1 | length 51.5
  Top Layer w20: C6.2 R51.1
NetC7_2: C7.2 R50.1 | length 56.4
  Top Layer w20: R50.1 4720,1936.73 C7.2
NetC8_1: C8.1 Q2.3 R5.1 R6.2 | length 567.6
  Top Layer w20: Q2.3@5115,2223.28 5115,2175 5120.31,2169.68 v1(5180,2169.68) ; v1(5286.73,1815) R6.2
  Bottom Layer w20: v1(5180,2169.68) 5180,2050 5286.73,1943.27 v1(5286.73,1815)
NetC8_2: C8.2 Q2.2 R1.1 R4.2 | length 600.1
  Top Layer w20: R4.2 4735.98,2151.73 4737.8,2153.54 4737.8,2171.98 4755.5,2189.69 4989.47,2189.69 ; 4989.5,2189.66 5012.02,2189.66 Q2.2 5019.13,2189.22 5053.28,2189.22 5072.59,2208.53 5072.59,2244.11 5082.55,2254.06 5160.27,2254.06 5179.02,2235.32 C8.2 ; C8.2@5180,2235 5249.69,2235 R1.1
NetC9_1: C9.1 D5.1 L1.1 U1.6 | length 147.9
  Top Layer w15: U1.6 6342.4,1643.74 6348.23,1649.57 6349.56,1649.57 6420.58,1720.58 6420.58,1748.79 C9.1
NetC9_2: C9.2 U1.1 | length 126.3
  Top Layer w15: U1.1 6342.4,1777.4 6350,1785 6400,1785 6420,1805 C9.2
NetC14_2: C14.2 R7.2 R9.2 U1.3 | length 422.2
  Top Layer w10: U1.3 6267.6,1792.6 6285,1810 v1(6325,1810) ; v1(6495,1810.32) R9.2
  Bottom Layer w10: v1(6325,1810) 6494.68,1810 v1(6495,1810.32)
NetC21_2: C21.2 U3.5 Y1.3 | length 350.5
  Top Layer w10: C21.2 4846.54,2326.54 4857.01,2337.01 Y1.3 4922.01,2337.01 4935,2350 4935,2429.14 4940.86,2435 5005.24,2435 5011.1,2440.86 U3.5
NetC22_2: C22.2 U3.6 Y1.1 | length 167.6
  Top Layer w10: Y1.1 5015,2400 5031.73,2416.73 C22.2 5045,2445 5030.79,2459.21 U3.6
NetC27_2: C27.2 R18.2 R21.1 R23.2 | length 170.6
  Top Layer w10: R18.2 R21.1 5251.94,2411.53 5251.94,2393.06 5263.06,2381.94 5263.06,2363.67 R23.2 C27.2
NetC30_1: C30.1 U3.47 | length 246.9
  Top Layer w10: C30.1 4805.63,2975.63 4845,3015 4930,3015 4952.05,2992.95 U3.47
NetC32_2: C32.2 U3.31 | length 86.5
  Top Layer w10: U3.31 5366.73,2847.95 C32.2
NetC40_1: C40.1 U2.4 | length 63.9
  Top Layer w10: C40.1@6532.91,2012.6 C40.1
  Top Layer w20: U2.4 C40.1@6532.91,2012.6
NetC50_2: C50.2 R60.2 R61.2
NetC51_2: C51.2 R62.1 R64.2 | length 55.7
  Top Layer w10: C51.2 5678.27,2673.27 R62.1
NetD2_1: D2.1 R3.1 R4.1 | length 649
  Top Layer w20: v1(4718.46,2050) 4718.46,2101.73 R4.1
  Bottom Layer w20: v1(4718.46,2050) 4875,2050 4945,1980 4945,1900 4995,1850 5162.68,1850
  other v1: 5145,1835 5175,1835 5145,1865 5175,1865 4745,2050 4745,2075 4718.46,2075.87
NetD3_2: "Q1 PMOS.4" D3.2 R5.2 | length 58.3
  Top Layer w20: R5.2 D3.2@5253.27,1873.27
  other v1: 5225,1870 5225,1900 5060,1940 5085,1940
NetD4_1: "Q3 NMOS.4" D4.1 R2.1 | length 192
  Top Layer w20: R2.1 4718.46,1995.98 4720.28,1997.8 4747.8,1997.8 4775,2025 4775,2105 4777.48,2107.48 4777.48,2124.41 D4.1
NetD6_K: D6.K R41.1 | length 89.7
  Top Layer w10: D6.K R41.1
NetD50_1: D50.1 R60.1
NetGPIO1_1: GPIO1.1 RN1.8
NetGPIO1_2: GPIO1.2 RN1.7
NetGPIO1_3: GPIO1.3 RN1.6
NetGPIO1_4: GPIO1.4 RN1.5
NetGPIO1_5: GPIO1.5 R36.2
NetGPIO1_6: GPIO1.6 R38.2
NetJ4_1: J4.1 R30.2 | length 75.3
  Top Layer w10: R30.2 6230,2370 J4.1
NetJ4_2: J4.2 R28.2 | length 77.4
  Top Layer w10: R28.2@6175,2438.27 6175,2420 6185,2410 J4.2
NetJ7_1: J7.1 R16.2 | length 91.8
  Top Layer w10: R16.2 4711.54,3051.54 4740,3080 J7.1
NetJ7_2: J7.2 R15.2 | length 93.8
  Top Layer w10: R15.2 4656.73,3041.73 4690,3075 J7.2
NetJ8_1: J8.1 R22.2 | length 87.6
  Top Layer w10: R22.2 5146.54,3051.54 5165,3070 J8.1
NetJ8_2: J8.2 R19.2 | length 88.3
  Top Layer w10: R19.2 5095,3050 5115,3070 J8.2
NetJ9_1: J9.1 R25.2 | length 80.3
  Top Layer w10: R25.2 6530,2315 6535,2320 J9.1
NetJ9_2: J9.2 R24.2 | length 78.3
  Top Layer w10: R24.2 J9.2
NetJ10_1: J10.1 R33.2
NetJ10_2: J10.2 R31.2
NetLED1_K: LED1.K R54.1 | length 89.7
  Top Layer w10: LED1.K R54.1
NetLED2_K: LED2.K R53.1 | length 88
  Top Layer w10: LED2.K R53.1
NetQ4_2: Q4.2 R14.1
NetR8_1: R8.1 U1.4 | length 60.4
  Top Layer w10: R8.1 R8.1@6211.22,1640.51 ; U1.4@6261.97,1640.51 U1.4
  Top Layer w20: R8.1@6211.22,1640.51 U1.4@6261.97,1640.51
NetR44_1: R44.1 T-BOOT0.1 U3.60 | length 90.3
  Top Layer w10: R44.1@4772.78,2655 4815,2655 4818.9,2651.1 U3.60
NetR45_2: R45.2 T-BOOT1.1 U3.28 | length 99.3
  Top Layer w10: U3.28 5361.1,2788.9 5380,2770 R45.2
P1: PWM1.1 RN2.8
P2: PWM2.1 RN2.7
P3: PWM3.1 RN2.6
P4: PWM4.1 RN2.5
P5: PWM5.1 RN3.8 | length 273
  Top Layer w10: PWM5.1 4521.33,2731.33 4558.67,2731.33 4570,2720 4570,2605 4605,2570 4613.63,2561.37 4645.64,2561.37 RN3.8
P6: PWM6.1 RN3.7 | length 347.7
  Top Layer w10: PWM6.1 4570,2830 4590,2810 4590,2615 4620,2585 RN3.7@4652.01,2585
P7: PWM7.1 RN3.6 | length 417.7
  Top Layer w10: PWM7.1 4575,2930 4610,2895 4610,2635 4627.12,2617.88 4652.01,2617.88 RN3.6@4654.89,2615
P8: PWM8.1 RN3.5 | length 467.8
  Top Layer w10: PWM8.1 4560,3030 4631.97,2958.03 4631.97,2663.14 4637.83,2657.28 4649.68,2657.28 RN3.5@4657.48,2649.48
PGND: "Q3 NMOS.1" "Q3 NMOS.2" "Q3 NMOS.3" C1.1 C2.1 C3.2 C4.2 C5.2 C6.1 C10.1 C11.1 C12.1 C15.2 C16.1 C17.1 C34.1 C37.1 C38.1 C39.1 C40.2 C41.1 C42.1 C43.1 D1.1 D4.2 D5.2 DBUS.1 PWM1.3 PWM2.3 PWM3.3 PWM4.3 PWM5.3 PWM6.3 PWM7.3 PWM8.3 Q4.1 R6.1 R7.1 R46.2 R47.2 U1.2 U2.2 | length 1073.4
  Top Layer w10: R6.1 5416.26,1815 D1.1 ; C15.2 6299.69,2090 C34.1 6339.68,2050 U2.2
  Top Layer w20: DBUS.1 6705,2711.18 6708.78,2707.4 Q4.1
  Bottom Layer w20: DBUS.1 6705,2760 6765,2700 6765,2105
  other v1: 5760,1605 5790,1605 6445,1630 6475,1630 5760,1635 5790.35,1635.29 6445,1660 6475,1660 6304.48,1679.13 6332.45,1678.84 6275,1680 6445,1690 6475,1690 5960,1695 5995,1695 6275,1705 6305,1705 6332.55,1706.06 5960,1725 5995,1725 5445,1845 5475,1845 5715,1850 5745,1850 5445,1880 5475,1880 5715,1880 5745,1880 6185,1945 6185,1975 5120,1990 5145,1990 5120,2015 5145,2015 5120,2040 5145,2040 5120,2065 5145,2065 6180,2080 6180,2105 4905,2125 4935,2125 4905,2155 4935,2155 5318.27,2170
RST: C18.1 KEY1.2 R55.1 R63.2 T-RST.1 U3.7 | length 370.5
  Top Layer w10: R55.1 C18.1 v1(5455,2470) ; v1(5505,2520) 5557.52,2520 KEY1.2 5607.52,2517.52 5655,2565 R63.2
  Bottom Layer w10: v1(5455,2470) 5465,2470 5475,2480 5475,2510 5485,2520 v1(5505,2520)
SWCLK: R28.1 U3.49 | length 1610.5
  Top Layer w10: U3.49 4912.36,2867.64 4965,2815 v1(4965,2640) ; v1(6057.39,2570) 6057.39,2492.61 6105,2445 R28.1
  Bottom Layer w10: v1(4965,2640) 4965,2630 5020,2575 6049.41,2575 6054.41,2570 v1(6057.39,2570)
SWDIO: R30.1 U3.46 | length 1618.7
  Top Layer w10: U3.46 4971.73,2878.27 5015,2835 v1(5015,2660) ; v1(6070,2595) 6110,2555 6110,2505 6130,2485 6216.73,2485 R30.1
  Bottom Layer w10: v1(5015,2660) 5080,2595 v1(6070,2595)
TIM2_CH1(PA15): RN3.1 U3.50
TIM2_CH2(PB3): RN3.2 U3.55
TIM3_CH1(PB4): RN2.1 U3.56
TIM3_CH2(PB5): RN2.2 U3.57
TIM3_CH3(PB0): RN2.3 U3.26
TIM3_CH4(PB1): RN2.4 U3.27
TIM8_CH3(PC8): RN3.4 U3.39
  other v1: 4715.01,2649.48 5110,2870
TIM8_CH4(PC9): RN3.3 U3.40
  other v1: 4715,2617.99 5085,2840
UART4_RX(PA1): R24.1 U3.15
UART4_TX(PA0): R25.1 U3.14
USART1_RX(PA10): R15.1 T-USART1_RX.1 U3.43 | length 536.7
  Top Layer w10: R15.1 4630.08,3028.19 4630.08,3016.06 4635.94,3010.2 4783.36,3010.2 4846.58,3073.42 4946.58,3073.42 5030.79,2989.21 U3.43
USART1_TX(PA9): R16.1 T-USART1_TX.1 U3.42 | length 423.6
  Top Layer w10: R16.1 4751.36,3041.36 4790.48,3041.36 4839.54,3090.42 4953.62,3090.42 5050.47,2993.57 U3.42
USART2_RX(PA3): Q4.3 R13.2 U3.17
USART3_RX(PB11): R19.1 U3.30 | length 99.2
  Top Layer w10: v1(5200,2830) 5230,2830 5231.73,2828.27 U3.30
  other v1: 5061.54,3034.51
USART3_TX(PB10): R22.1 U3.29 | length 75
  Top Layer w10: v1(5225,2805) 5245,2805 5248.58,2808.58 U3.29
  other v1: 5180,3034.51
USART6_RX(PC7): R31.1 U3.38
USART6_TX(PC6): R33.1 U3.37
VDD: C19.1 C20.2 C26.1 C28.2 C29.1 C33.2 R42.2 T-1.1 U3.1 U3.19 U3.32 U3.48 U3.64 | length 2360.5
  Top Layer w10: C26.1 4785.31,2885.32 4810,2910 4840,2910 C28.2@4870,2940 ; C20.2@4775,2571.19 4802.77,2571.19 4803.94,2572.36 U3.64 4912.64,2572.36 ; C19.1 4855,2470 4875,2450 4915,2450 4932.36,2467.36 U3.1 4932.36,2552.64 4912.64,2572.36 ; C28.2 4897.13,2946.54 4902.99,2952.39 4902.99,2974.14 4908.85,2980 4925.99,2980 4932.16,2973.83 4932.16,2938.7 U3.48 4932.36,2872.64 4991.45,2813.55 4991.45,2611.73 ; 5100,2615 5100,2805 5162.64,2867.64 U3.32 5342.64,2867.64 5350,2875 5350,2890 5360,2900 C33.2 ; R42.2 5535,2421.82 5475,2481.82 5475,2570 5428.27,2616.73 C29.1 5356.73,2616.73 5351.73,2611.73 U3.19 5100,2611.73 4991.45,2611.73 ; 4912.64,2572.36 4952.01,2611.73 4991.45,2611.73
pads on no net: CAN1.5 CAN2.5 U3.4 U3.8 U3.10 U3.11 U3.16 U3.35 U3.36 U3.41 U3.51 U3.52 U3.53 U3.54 U3.58 U3.59 U3.61 U3.62 Y1.2 Y1.4

## Polygon pours and split planes (outlines as drawn)
5V on Top Layer "5V_L01_P032" (solid, remove dead copper, pour order 32): 6210,1850 6135,1850 6125,1860 6125,2130 6130,2135 6150,2135 6155,2130 6155,2065 6170,2050 6320,2050 6325,2045 6325,2010 6315,2000 6175,2000 6160,1985 6160,1930 6180,1910 6212.07,1910 6212.21,1909.86
NetD2_1 on Top Layer "NETD2_1_L01_P029" (solid, remove dead copper, pour order 29): 4715,2135 4750,2135 4757.5,2127.5 4757.5,2042.5 4747.5,2032.5 4712.5,2032.5 4707.5,2037.5 4707.5,2127.5
IGND on Top Layer "IGND_L01_P025" (solid, remove dead copper, pour order 25): 4705,1865 4750,1865 4760,1875 4760,1990 4765,1995 4935,1995 4950,1980 4950,1910 4955,1910 4970,1895 5055,1895 5060,1890 5060,1810 5055,1805 4750,1805 4750,1820 4735,1835 4705,1835
PGND on Top Layer "PGND_L01_P024" (solid, remove dead copper, pour order 24): 4250,2215 4262.85,2227.85 4572.15,2227.85 4627.15,2287.85 5257.15,2287.85 5277.15,2267.85 5452.15,2267.85 5487.15,2232.85 5487.15,2147.85 5507.15,2127.85 6792.15,2127.85 6792.15,1122.85 6777.15,1122.85 4252.15,1122.85
NetD3_2 on Top Layer "NETD3_2_L01_P022" (solid, remove dead copper, pour order 22): 5217.5,1920 5272.5,1920 5282.5,1910 5282.5,1855 5272.5,1845 5217.5,1845 5207.5,1855 5207.5,1910
NetD3_2 on Top Layer "NETD3_2_L01_P021" (solid, remove dead copper, pour order 21): 4965,1955 4970,1960 5100,1960 5105,1955 5105,1925 5100,1920 4970,1920 4965,1925
Net3.3A_2 on Top Layer "NET3.3A_2_L01_P020" (solid, remove dead copper, pour order 20): 5230,2205 5235,2210 5280,2210 5285,2205 5285,2145 5290,2140 5465,2140 5485,2120 5485,1955 5470,1940 5425,1940 5410,1925 5410,1855 5395,1840 5340,1840 5325,1855 5325,1920 5320,1925 5310,1925 5210,1925 5180,1955 5180,2115 5205,2140 5225,2140 5230,2145
PGND on Top Layer "PGND_L01_P019" (solid, remove dead copper, pour order 19): 4815,2100 4805,2090 4805,2030 4815,2020 4945,2020 4960,2035 4960,2165 4950,2175 4895,2175 4890,2170 4890,2115 4875,2100
24V on Top Layer "24V_L01_P015" (solid, remove dead copper, pour order 15): 4980,2122.5 4965,2107.5 4965,1987.5 4980,1972.5 5085,1972.5 5100,1987.5 5100,2102.5 5080,2122.5
24V on Top Layer "24V_L01_P013" (solid, remove dead copper, pour order 13): 4700,1845 4700,1860 4700,2175 4730,2205 5040,2205 5045,2210 5045,2280 5040,2285 4625,2285 4485,2145 4485,1790 4695,1790 4700,1800
24V_OUT on Top Layer "24V_OUT_L01_P012" (solid, remove dead copper, pour order 12): 5530,2103.92 5551.44,2120 5625,2120 5885,2120 5925,2080 5925,1630 5935,1620 6225,1620 6240,1605 6285,1605 6290,1610 6290,1660 6325,1660 6325,1585 6290,1550 5860,1550 5845,1565 5845,1890 5805,1930 5720,1930 5720,1925 5690,1895 5690,1810 5685,1805 5565,1805 5530,1840
5V on Top Layer "5V_L01_P011" (solid, remove dead copper, pour order 11): 6205,1910 6790,1910 6790,1420 6710,1420 6705,1425 6705,1830 6685,1850 6200,1850 6195,1855 6195,1905
PGND on Top Layer "PGND_L01_P010" (solid, remove dead copper, pour order 10): 6285,1770 6325,1770 6325,1720 6360,1720 6360,1665 6255,1665 6255,1720 6285,1720
NetC9_1 on Top Layer "NETC9_1_L01_P009" (solid, remove dead copper, pour order 9): 6325,1660 6370,1660 6370,1625 6395,1600 6620,1600 6620,1420 6555,1420 6545,1430 6545,1475 6525,1495 6465,1495 6460,1500 6460,1530 6440,1550 6345,1550 6325,1570
24V on Top Layer "24V_L01_P005" (solid, remove dead copper, pour order 5): 4483.65,1934.6 4635.74,1934.6 4635.74,1894.6 4750.74,1779.6 4750.74,1774.6 5685.4,1774.6 5720,1740 5720,1570.39 5780.78,1509.6 6210.74,1509.6 6210.74,1304.6 5725.74,1304.6 5688.65,1341.69 5688.65,1416.69 5645.74,1459.6 4640.74,1459.6 4630.74,1469.6 4630.74,1699.6 4483.65,1699.6
IGND on Top Layer "IGND_L01_P001" (solid, remove dead copper, pour order 1): 4242.85,2217.15 4442.85,2217.15 4480,2180 4480,1690 4630,1690 4630,1470 4650,1450 5650,1450 5690,1410 5690,1330 5720,1300 6210.74,1300 6210.74,1510 6440,1510 6440,1360 6465,1335 6555,1335 6555,1125 4245,1125
IGND on Top Layer "IGND_L01_P000" (solid, remove dead copper, pour order 0): 4250,2215
PGND on Bottom Layer "PGND_L02_P031" (solid, remove dead copper, pour order 31): 4375.03,3080 4375.03,2267.65 4610.03,2267.65 4630.03,2287.65 5265.03,2287.65 5285.03,2267.65 5460.03,2267.65 5490.03,2237.65 5490.03,2137.65 5495.03,2137.65 5505.03,2127.65 6785.03,2127.65 6785.03,1127.65 6780.03,1122.65 4245.03,1122.65 4245.03,3080
PGND on Bottom Layer "PGND_L02_P030" (solid, remove dead copper, pour order 30): 4245,3065
NetD2_1 on Bottom Layer "NETD2_1_L02_P028" (solid, remove dead copper, pour order 28): 4707.14,2088.93 4702.14,2083.93 4702.14,2033.93 4727.14,2008.93 4882.14,2008.93 4917.14,1973.93 4917.14,1888.93 4997.14,1808.93 5187.14,1808.93 5195,1816.79 5195,1881.07 5177.14,1898.93 5007.14,1898.93 4970,1936.07 4970,2015 4896.07,2088.93
IGND on Bottom Layer "IGND_L02_P027" (solid, remove dead copper, pour order 27): 4255.08,2215 4445,2215 4480,2180 4605,2180 4700,2085 4700,2035 4725,2010 4880,2010 4915,1975 4915,1835 4895,1815 4755,1815 4650,1920 4650,1955 4625,1980 4495,1980 4480,1965 4480,1705 4615,1705 4675,1645 4675,1475 4970,1475 4990,1455 4990,1130 4255,1130
NetD3_2 on Bottom Layer "NETD3_2_L02_P023" (solid, remove dead copper, pour order 23): 5050,1960 5045,1955 5045,1925 5050,1920 5185,1920 5205,1900 5205,1855 5215,1845 5240,1845 5250,1855 5250,1910 5200,1960
24V on Bottom Layer "24V_L02_P016" (solid, remove dead copper, pour order 16): 4910,2285 4905,2280 4905,2210 4920,2195 4940,2195 4975,2160 4975,1985 4985,1975 5080,1975 5095,1990 5095,2210 5020,2285
IGND on Bottom Layer "IGND_L02_P006" (solid, remove dead copper, pour order 6): 5000,1470 5650,1470 5760,1360 6220,1360 6220,1510 6440,1510 6440,1360 6465,1335 6550,1335 6550,1130 5000,1130
24V on Bottom Layer "24V_L02_P003" (solid, remove dead copper, pour order 3): 4635,1935 4635,1715 4490,1715 4490,1935

## Keep-outs
Keep-Out Layer:
  lines w10: 6667.85,3312.15 6670,3314.31 ; 6667.85,3312.15 4360,3312.15 ccw(c4360,3195) 4242.85,3195 4242.85,1239.31 4245,1237.15 ccw(c4362.15,1237.15) 4362.15,1120 6670,1120 ccw(c6670,1237.15) 6787.15,1237.15 6787.15,3197.15 ccw(c6670,3197.15) 6670,3314.31 ; 6667.85,3312.15 6670,3314.31

## Other copper
Bottom Layer:
  rectangle net 24V: 5980,1371 6198,1500